# EAGLE board QuadSensorBoard (EAGLE 6.6.0)

Size 25.4 x 25.4 mm. Coordinates in mm from the lower left corner, seen from the top.
Outline: 0,0 25.4,0 25.4,25.4 0,25.4 0,0
Copper layers (1*16): Top 0.035mm / dielectric 1.5mm / Bottom 0.035mm
Design rules "default": minimum track width 10mil, minimum drill 24mil, track to track 8mil, track to pad 8mil, pad to pad 8mil, via to via 8mil, smd to smd 8mil, copper to edge 40mil, drill to drill 8mil, minimum pad ring 10mil, minimum via ring 8mil, stop-mask expansion 4mil, vias tented up to drill 0mil, thermal gap 10mil

## Footprints (pad centres in the part's own frame; a part is rotated, then mirrored left to right if it is on the bottom)
BMP180 = smd 0.6 x 0.5: 1 1.5,1.45; 2 0,1.45; 3 -1.5,1.45; 4 -1.5,-1.45; 5 0,-1.45; 6 1.5,-1.45 | smd 0.5 x 0.6: 7 1.5,0
LGA-24 = smd 0.29 x 0.4: 1 3.01,2.45; 6 3.01,0; 7 2.58,0; 8 2.15,0; 9 1.72,0; 10 1.29,0; 11 0.86,0; 12 0.43,0; 13 0,0; 18 0,2.45; 19 0.43,2.45; 20 0.86,2.45; 21 1.29,2.45; 22 1.72,2.45; 23 2.15,2.45; 24 2.58,2.45 | smd 0.4 x 0.29: 2 3.01,1.87; 3 3.01,1.44; 4 3.01,1.01; 5 3.01,0.58; 14 0,0.58; 15 0,1.01; 16 0,1.44; 17 0,1.87
SO08 = smd 0.61 x 2.21: 1 -1.905,-2.616; 2 -0.635,-2.616; 3 0.635,-2.616; 4 1.905,-2.616; 5 1.905,2.616; 6 0.635,2.616; 7 -0.635,2.616; 8 -1.905,2.616

## Placement (x,y rotation side)
U1  BMP180  [BMP180]  11.43,8.89 0 top
U$1  LSM9DS1  [LGA-24]  10.16,13.97 0 top
U$2  LM2931  [SO08]  5.08,19.05 0 top

## Library data of the parts
U1 = SparkFun-Sensors
U$1 = myLib
U$2 = SparkFun-PowerIC

## Nets
3.3V: U1.2 U1.3 U$1.1 U$1.3 U$1.22 U$1.23 U$2.1
5V: U$2.8
GND: U1.7 U$1.14 U$1.15 U$1.16 U$1.17 U$1.18 U$1.19 U$1.20 U$2.2 U$2.3 U$2.6 U$2.7

## Tracks (layer width: path | path; a pad name or v marks a point on that pad's centre or on a via)
3.3V  (6 unrouted)
GND  (11 unrouted)